# EAGLE board analog (EAGLE 9.6.2)
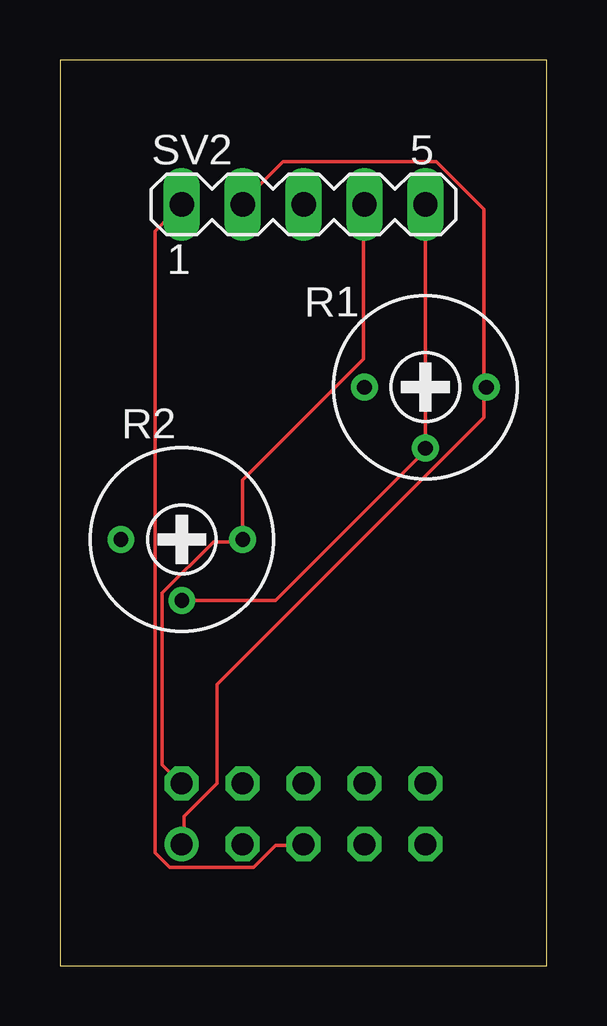
[diagram p0: board, top side]
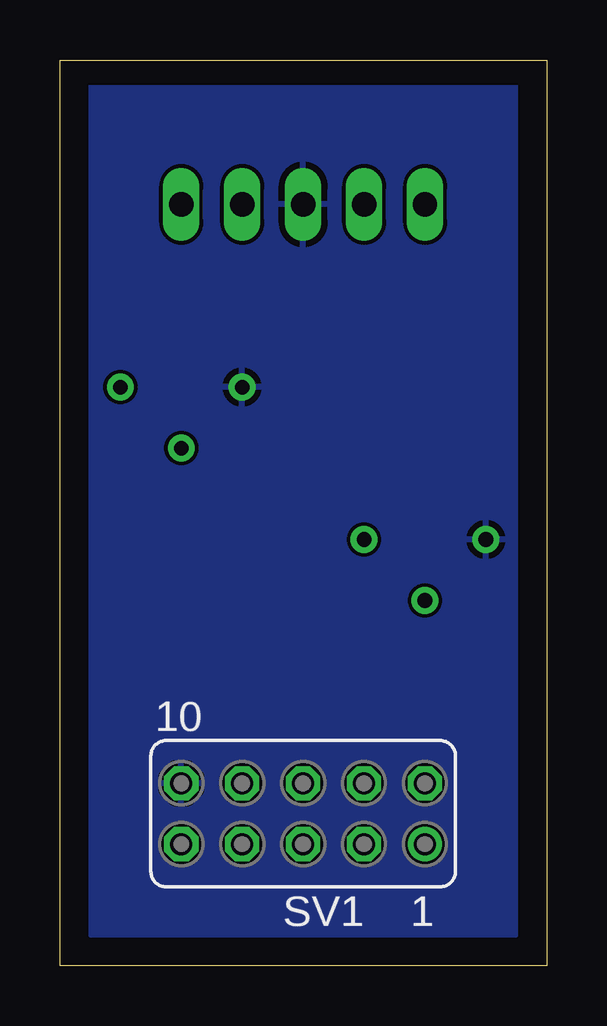
[diagram p1: board, bottom side, seen from below]

Size 20.3 x 37.77 mm. Coordinates in mm from the lower left corner, seen from the top.
Outline: 0,0 20.3,0 20.3,37.77 0,37.77 0,0
Copper layers (1*16): Top 0.035mm / dielectric 1.5mm / Bottom 0.035mm
Design rules "default": minimum track width 6mil, minimum drill 0.35mm, track to track 6mil, track to pad 6mil, pad to pad 6mil, via to via 6mil, smd to smd 6mil, copper to edge 40mil, drill to drill 6mil, minimum pad ring 10mil, minimum via ring 8mil, stop-mask expansion 4mil, vias tented up to drill 0mil, thermal gap 10mil

## Footprints (pad centres in the part's own frame; a part is rotated, then mirrored left to right if it is on the bottom)
RTRIM3339P = drill 0.61: 1 -2.54,0; 2 0,-2.54; 3 2.54,0
FE05-2 = drill 0.914: 1 -5.08,1.27 | drill 0.914 octagon: 2 -5.08,-1.27; 3 -2.54,1.27; 4 -2.54,-1.27; 5 0,1.27; 6 0,-1.27; 7 2.54,1.27; 8 2.54,-1.27; 9 5.08,1.27; 10 5.08,-1.27
MA05-1 = drill 1.016 long: 1 -5.08,0; 2 -2.54,0; 3 0,0; 4 2.54,0; 5 5.08,0

## Placement (x,y rotation side)
R1  1k  [RTRIM3339P]  15.24,24.13 0 top
R2  1K  [RTRIM3339P]  5.08,17.78 0 top
SV1  Q43 DIGITAL  [FE05-2]  10.16,6.35 180 bottom
SV2  NTSC VIDEO  [MA05-1]  10.16,31.75 0 top

## Library data of the parts
R1 R2 = rcl; SPICEMODEL: X; SPICEPREFIXL: POT
SV1 = con-lsta; OC_FARNELL: unknown; OC_NEWARK: unknown
SV2 = con-lstb; OC_FARNELL: unknown; OC_NEWARK: unknown

## Nets
N$2: R1.3 SV1.1 SV2.2
N$3: R2.3 SV1.2 SV2.4
N$4: R1.2 R2.2 SV2.5
N$7: SV1.5 SV2.1
VSS: R1.1 R2.1 SV1.10 SV2.3

## Tracks (layer width: path | path; a pad name or v marks a point on that pad's centre or on a via)
N$2
  Top 0.152: SV2.2 7.62,31.85 9.3,33.53 15.7,33.53 17.68,31.55 17.68,24.23 R1.3 17.68,24.08 17.68,22.86 6.55,11.73 6.55,7.62 5.18,6.25 5.18,5.18 SV1.1
N$3
  Top 0.152: SV1.2 5.03,7.62 4.27,8.38 4.27,15.54 6.4,17.68 7.62,17.68 R2.3 7.62,20.27 12.65,25.3 12.65,31.7 SV2.4
N$4
  Top 0.152: R2.2 8.99,15.24 15.24,21.49 R1.2 SV2.5
N$7
  Top 0.152: SV2.1 3.96,30.63 3.96,4.72 4.57,4.12 8.08,4.12 8.99,5.03 10.06,5.03 SV1.5
VSS
  pour Bottom: 1.27,36.83 19.05,36.83 19.05,1.27 1.27,1.27